# EAGLE board S88-RJ45-Bridge (EAGLE 8.1.0)
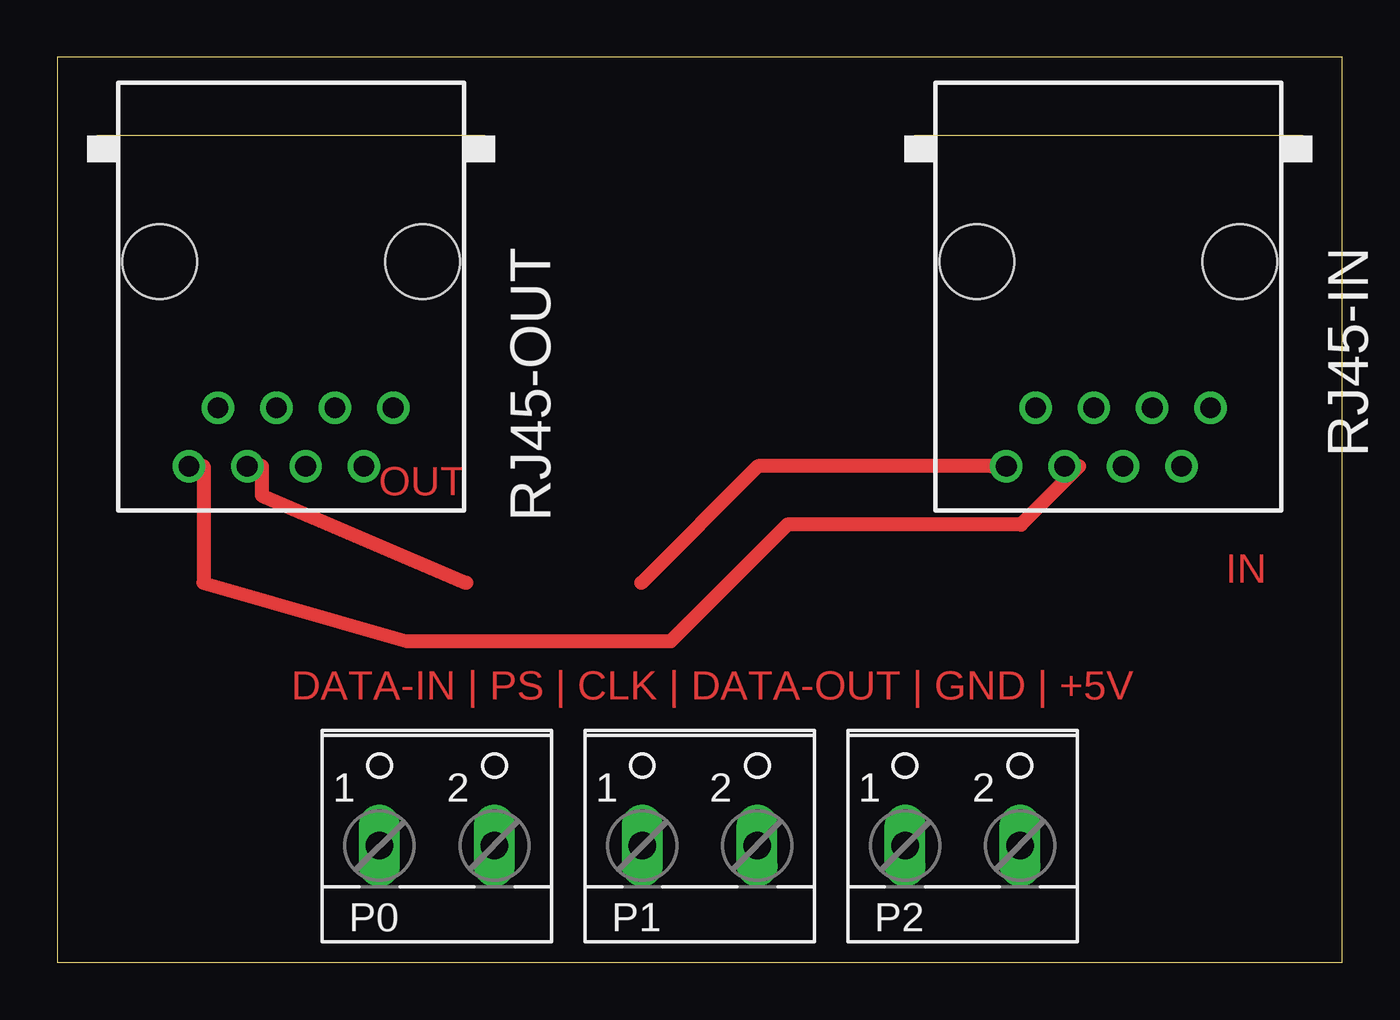
[diagram p0: board, top side]
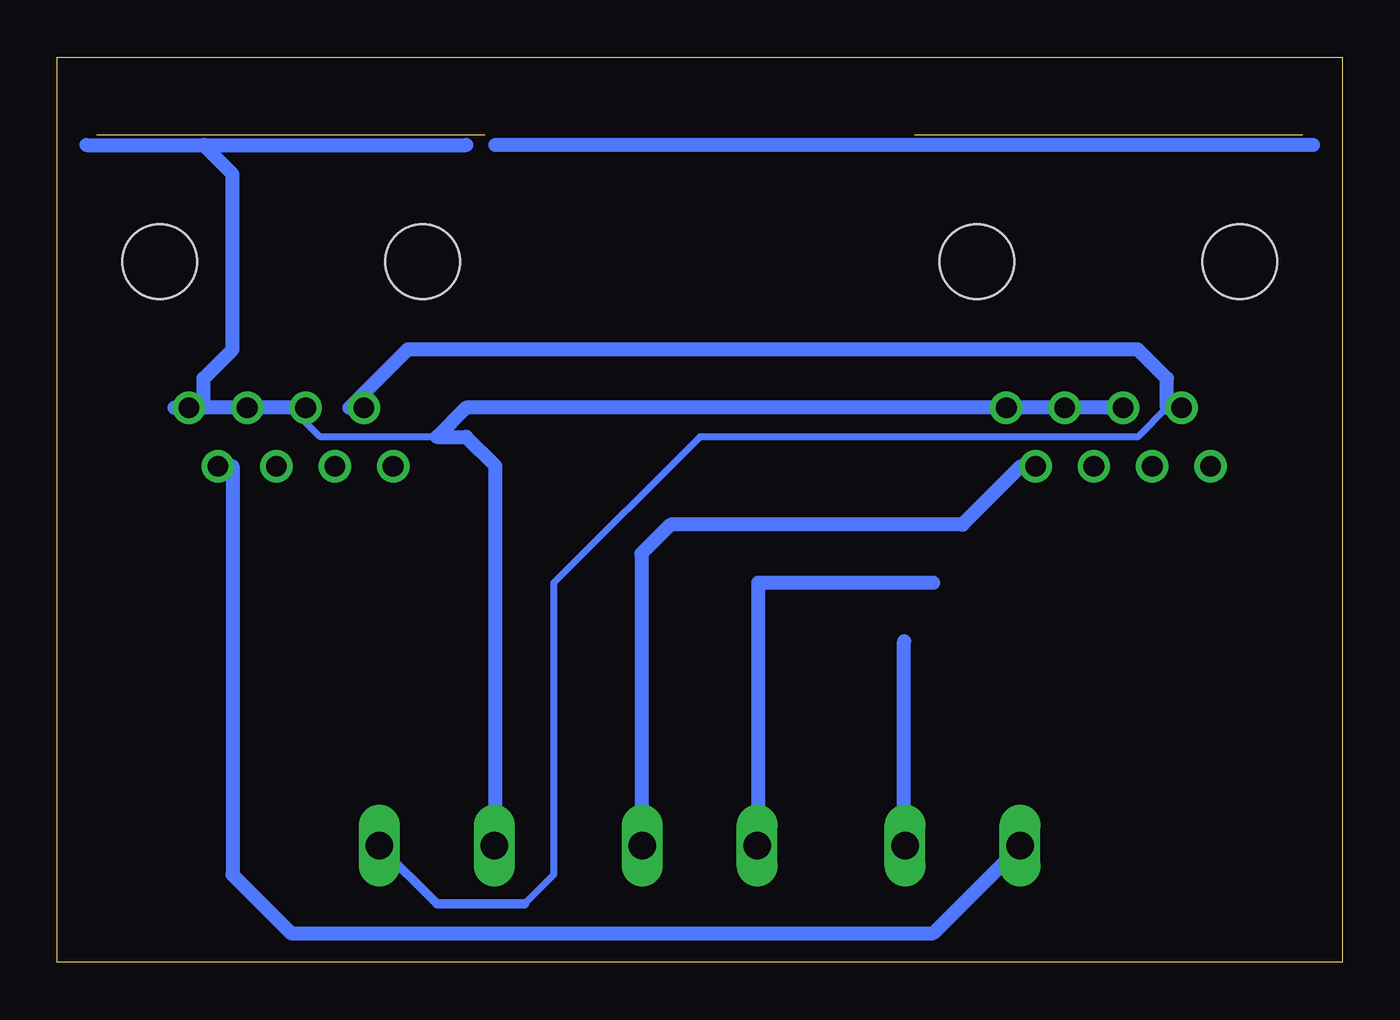
[diagram p1: board, bottom side, seen from below]

Size 55.88 x 39.37 mm. Coordinates in mm from the lower left corner, seen from the top.
Outline: 0,0 55.88,0 55.88,39.37 0,39.37 0,0
Copper layers (1*16): Top 0.035mm / dielectric 1.5mm / Bottom 0.035mm
Design rules "default": minimum track width 10mil, minimum drill 24mil, track to track 8mil, track to pad 8mil, pad to pad 8mil, via to via 8mil, smd to smd 8mil, copper to edge 40mil, drill to drill 8mil, minimum pad ring 10mil, minimum via ring 8mil, stop-mask expansion 4mil, vias tented up to drill 0mil, thermal gap 10mil

## Footprints (pad centres in the part's own frame; a part is rotated, then mirrored left to right if it is on the bottom)
W237-102 = drill 1.194 long: 1 -2.5,-1.27; 2 2.5,-1.27
RJ45-NO-SHIELD = drill 0.9 pad 1.4: 1 -4.445,6.35; 2 -3.175,8.89; 3 -1.905,6.35; 4 -0.635,8.89; 5 0.635,6.35; 6 1.905,8.89; 7 3.175,6.35; 8 4.445,8.89 | hole 3.251: -5.715,0; 5.715,0

## Placement (x,y rotation side)
P0  [W237-102]  16.51,6.35 0 top
P1  [W237-102]  27.94,6.35 0 top
P2  [W237-102]  39.37,6.35 0 top
RJ45-IN  [RJ45-NO-SHIELD]  45.72,30.48 180 top
RJ45-OUT  [RJ45-NO-SHIELD]  10.16,30.48 180 top

## Library data of the parts
P0 P1 P2 = con-wago-500
RJ45-IN RJ45-OUT = con-tycoelectronics

## Tracks (layer width: path | path; a pad name or v marks a point on that pad's centre or on a via)
S$1
  Bottom 0.305: 39.37,22.86 44.45,22.86 45.72,24.13
  Bottom 0.61: 10.16,24.13 38.1,24.13 39.37,22.86 38.1,22.86 36.83,21.59 36.83,5.08 | 45.72,24.13 49.53,24.13 | 49.53,24.13 50.8,24.13 | 49.53,24.13 49.53,25.4 48.26,26.67 48.26,34.29 49.53,35.56 | 54.61,35.56 49.53,35.56 | 49.53,35.56 38.1,35.56
S$2
  Bottom 0.305: 7.62,24.13 8.89,22.86 27.94,22.86 34.29,16.51 34.29,3.81 35.56,2.54
  Bottom 0.406: 41.91,5.08 39.37,2.54 35.56,2.54
  Bottom 0.61: 7.62,24.13 7.62,25.4 8.89,26.67 40.64,26.67 43.18,24.13
S$4
  Bottom 0.61: 1.27,35.56 36.83,35.56
S$7
  Bottom 0.61: 13.97,21.59 16.51,19.05 29.21,19.05 30.48,17.78 30.48,5.08
S$8
  Top 0.61: 8.89,21.59 8.89,20.32 17.78,16.51
S$9
  Top 0.61: 40.64,21.59 30.48,21.59 25.4,16.51
S$10
  Bottom 0.61: 17.78,16.51 25.4,16.51 25.4,5.08
S$12
  Top 0.61: 44.45,21.59 41.91,19.05 31.75,19.05 26.67,13.97 15.24,13.97 6.35,16.51 6.35,21.59
S$13
  Bottom 0.61: 19.05,5.08 19.05,13.97
S$14
  Bottom 0.61: 48.26,21.59 48.26,3.81 45.72,1.27 17.78,1.27 13.97,5.08

## Text on the board
Top: OUT | IN | DATA-IN | PS | CLK | DATA-OUT | GND | +5V